# Altium PCB triumvi_v9_sensing.PcbDoc
Units mil, origin at the board's own origin, x right, y up, seen from the top; angles counter-clockwise.
Board outline 1100 x 1020 mil, 4 copper layers (Top Layer, GND, Signal Layer 2, Bottom Layer), stack 30.634 mil thick; 63 components, 46 nets, 225 pads, 86 vias.
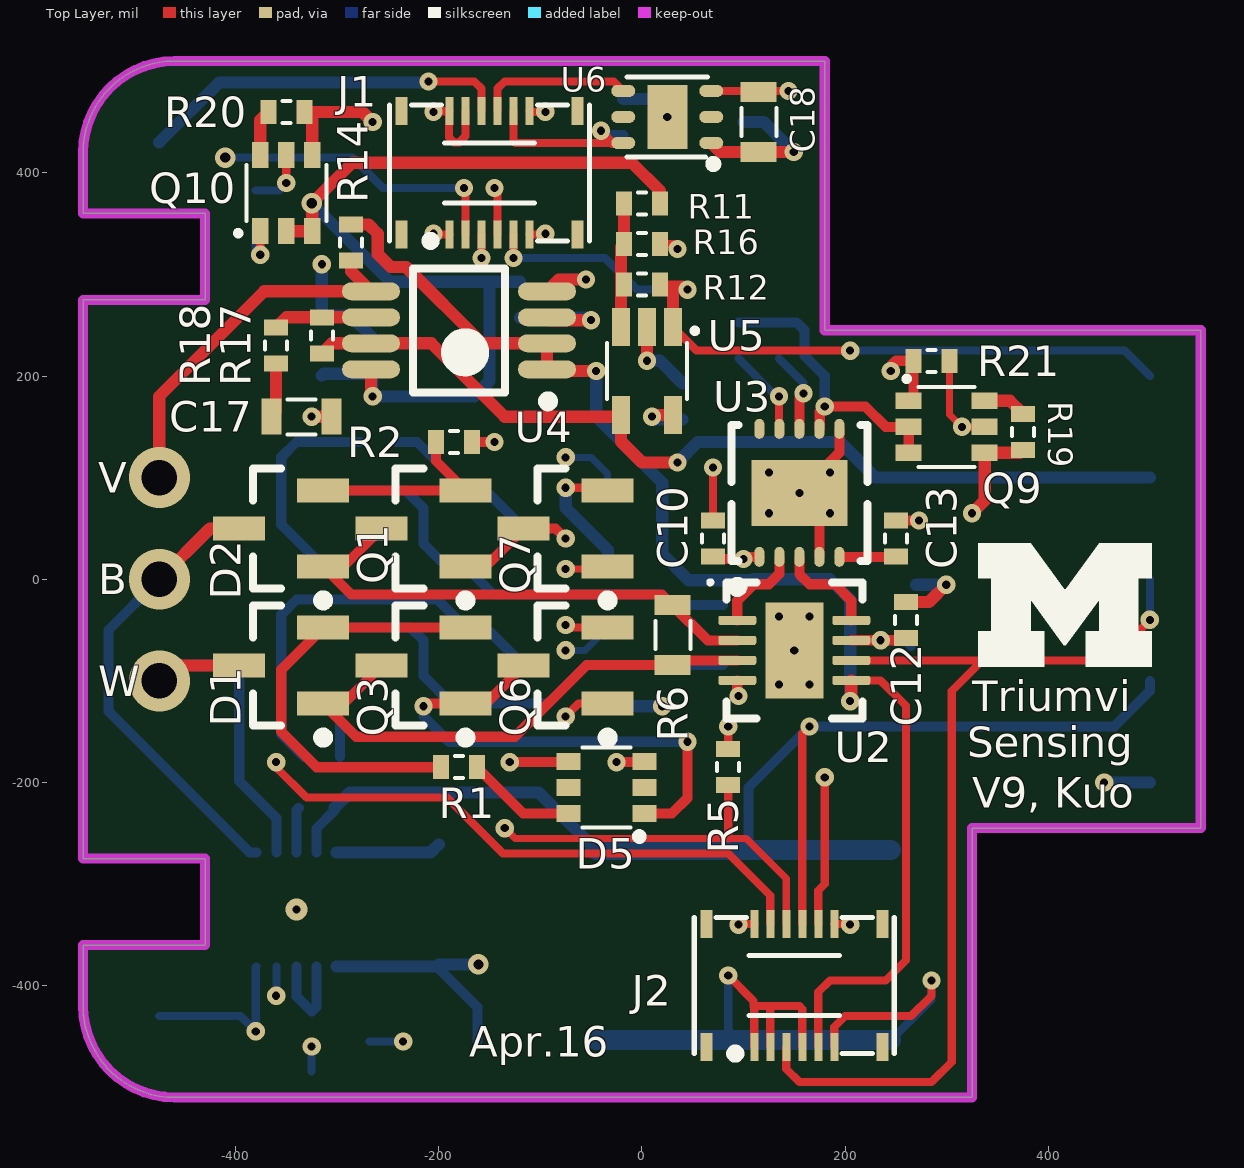
[diagram p0: Top Layer view]
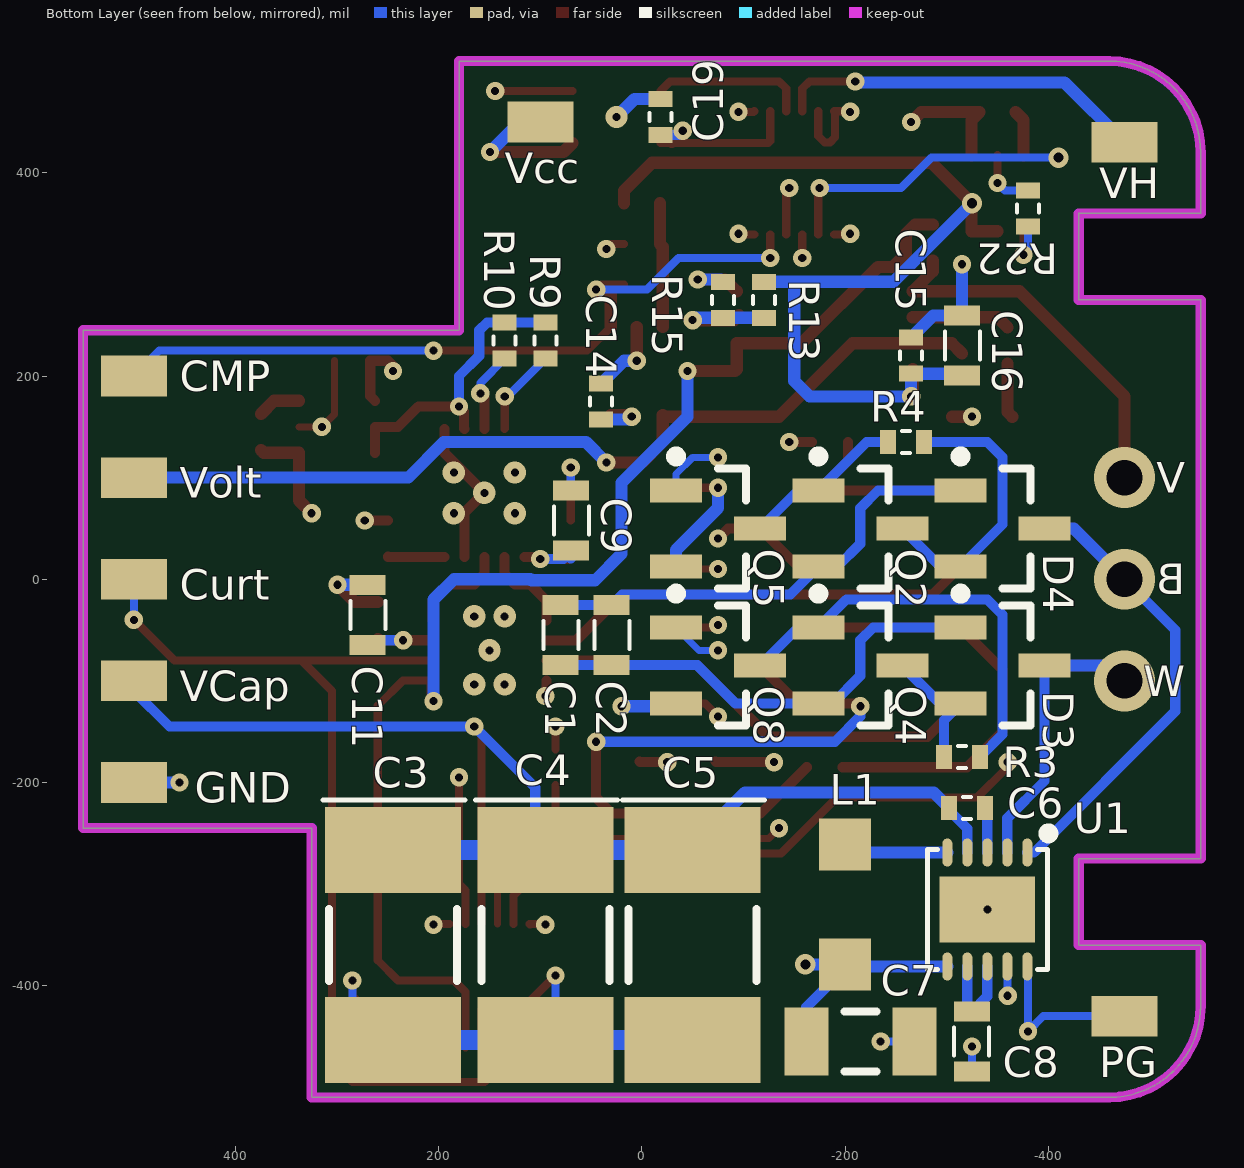
[diagram p1: Bottom Layer view, seen from below]
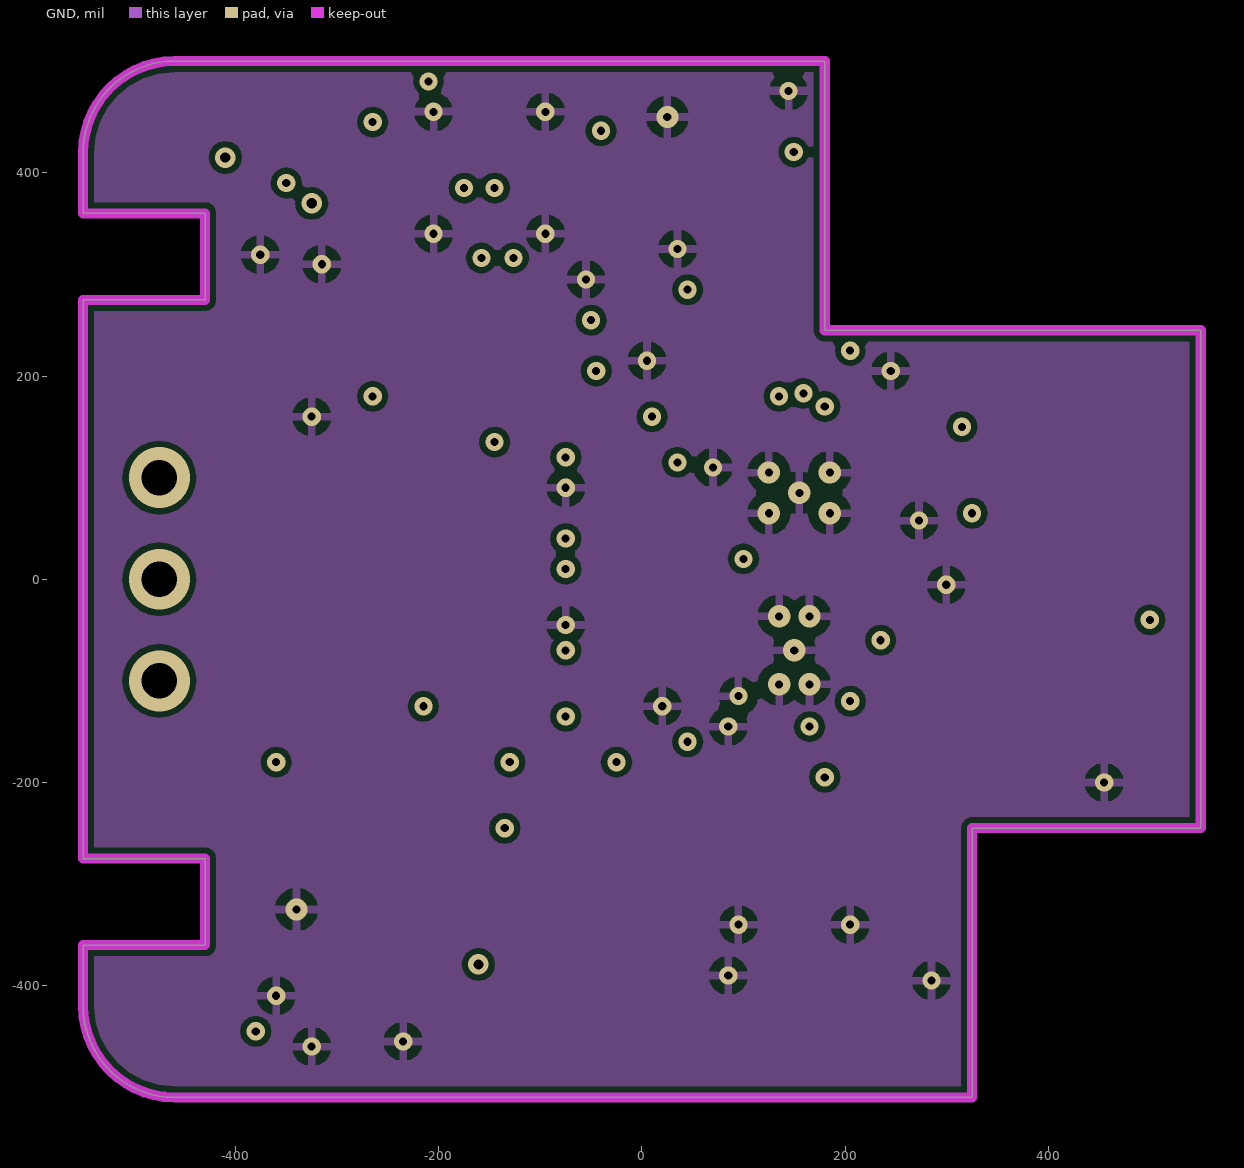
[diagram p2: GND]
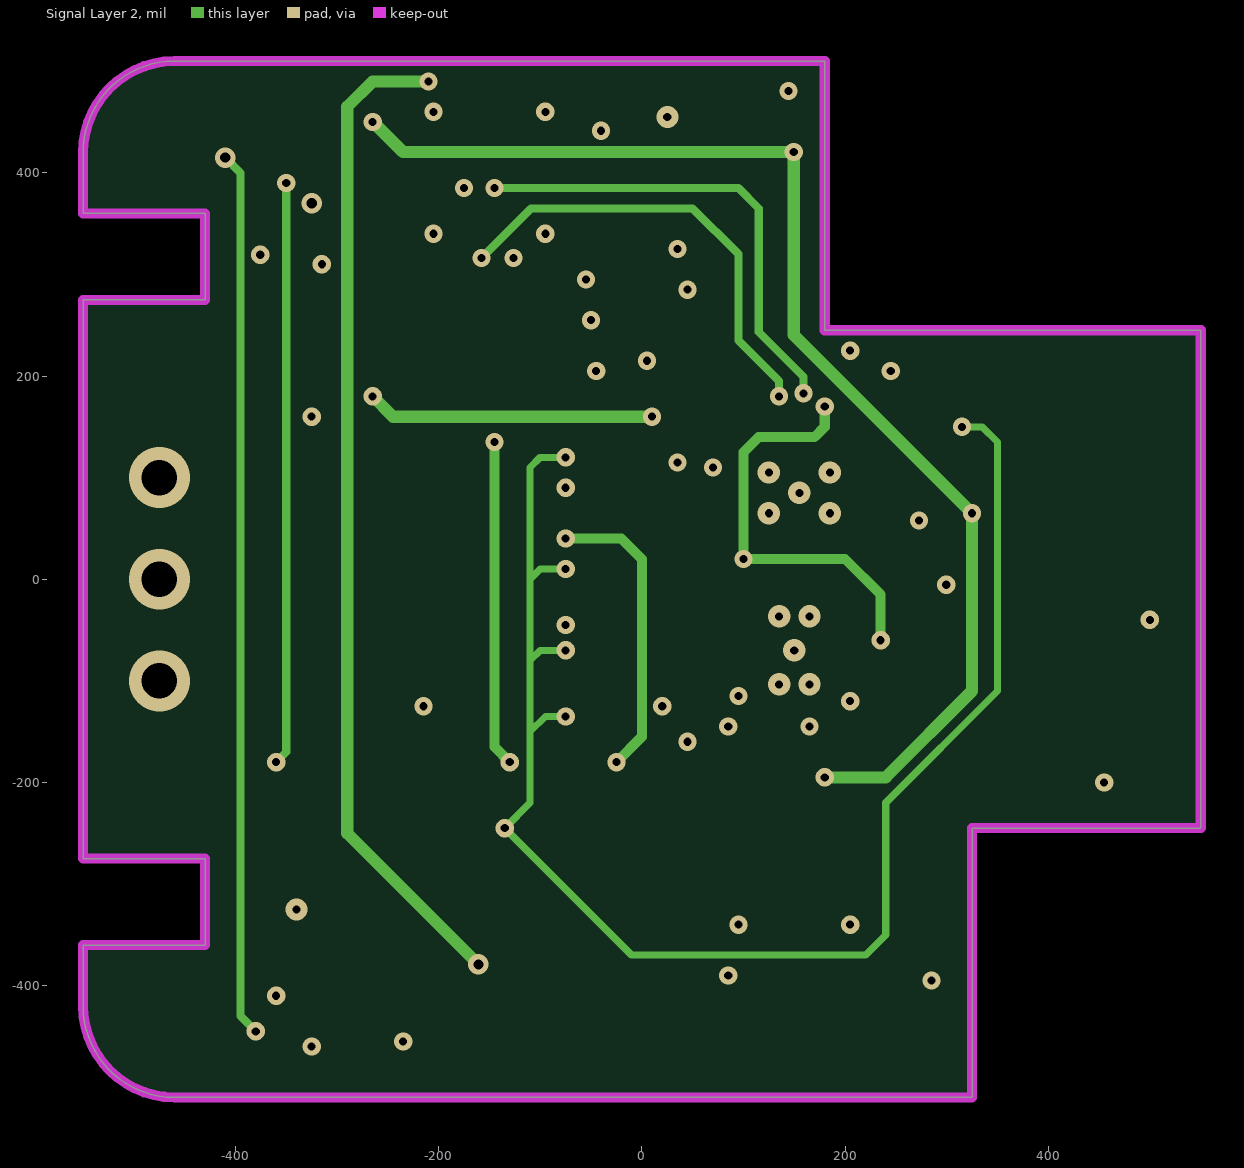
[diagram p3: Signal Layer 2]

## Layer stack, top to bottom
Top Solder: solder mask 0.4, Solder Resist, Dk 3.5
Top Layer: signal copper 1.4
Dielectric 1: core 10, FR-4, Dk 4.2
GND: signal copper 1.417
Dielectric 3: prepreg 5, Dk 4.2
Signal Layer 2: signal copper 1.417
Dielectric 2: core 10, Dk 4.2
Bottom Layer: signal copper 1.4
Bottom Solder: solder mask 0.4, Solder Resist, Dk 3.5

## Board outline
-550,-420 ccw(c-460,-420) -460,-510 325,-510 325,-245 550,-245 550,245 180,245 180,510 -460,510 ccw(c-460,420) -550,420 -550,360 -430,360 -430,275 -550,275 -550,-275 -430,-275 -430,-360 -550,-360

## Design rules (kind name [scope] priority, off if disabled: settings)
Clearance "non plated holes" [InPadClass('NPHOLES')] p1: gap=10 // Sunstone Circuits Minimum Clearance Rule (MLB~4&6 Layer Designs)
Clearance "Clearance~Sunstone Circuits" [All] p2: gap=6 // Sunstone Circuits Minimum Clearance Rule (MLB~4&6 Layer Designs)
DiffPairsRouting [All] p1: maxlimit=10 minlimit=10 mostfreqgap=10 toplayer_minwidth=6 toplayer_maxwidth=15 toplayer_prefwidth=15 midlayer1_minwidth=6 midlayer1_maxwidth=15 midlayer1_prefwidth=15 midlayer2_minwidth=6 midlayer2_maxwidth=15 midlayer2_prefwidth=15 bottomlayer_minwidth=6 bottomlayer_maxwidth=15 bottomlayer_prefwidth=15 maxuncoupledlength=500
HoleSize "HoleSize~Sunstone Circuits" [All] p1: absolutevalues=TRUE maxlimit=251 minlimit=8 maxpercent=80.000 minpercent=20.000 // Sunstone Circuits Hole Size Rule (MLB~4&6 Layer Designs)
HoleSize Testpoint [All] p2: absolutevalues=TRUE maxlimit=100 minlimit=1 maxpercent=80.000 minpercent=20.000
HoleSize TestPointUsage [All] p3: absolutevalues=TRUE maxlimit=100 minlimit=1 maxpercent=80.000 minpercent=20.000
MinimumAnnularRing "MinimumAnnularRing~Sunstone Circuits" [All] p1 off: minimumring=7 // Sunstone Circuits Minimum Annular Ring (MLB~4&6 Layer Designs)
MinimumSolderMaskSliver [All] p1 off: minsoldermaskwidth=10
PlaneClearance "PlaneClearance~Sunstone Circuits" [All] p1: clearance=12 // Sunstone Circuits Power Plane Clearance Rule (MLB~4&6 Layer Designs)
PlaneConnect "PlaneConnect~Sunstone Circuits" [All] p1: planeconnectstyle=Relief reliefexpansion=10 reliefentries=4 reliefconductorwidth=8 reliefairgap=10 // Sunstone Circuits Power Plane Connect Rule (MLB~4&6 Layer Designs)
PolygonConnect "PolygonConnect~Sunstone Circuits" [All] p1: connectstyle=Relief reliefconductorwidth=8 reliefentries=4 polygonreliefangle="90 Angle" airgapwidth=10 // Sunstone Circuits Polygon Connect Style (MLB~4&6 Layer Designs)
RoomDefinition U_Power_supply [InComponentClass('U_Power_supply')] p1 off: confinementstyle=ConfineIn formatcopy=TRUE lockcomponents=FALSE outline -412.44,316.84 -412.44,443.16 -392.48,443.16 -392.48,488.7 -47.99,488.7 -47.99,527.99 97.99,527.99 97.99,506.26 149.61,506.26 327.48,506.26 327.48,243.7 327.48,212.44 363.16,212.44 363.16,187.48 403.7,187.48 403.7,102.52 363.16,102.52 363.16,98.66 236.84,98.66 236.84,316.84
RoomDefinition U_Connectors [InComponentClass('U_Connectors')] p2 off: confinementstyle=ConfineIn formatcopy=TRUE lockcomponents=FALSE outline -260.93,312.59 -260.93,487.41 -39.07,487.41 260.93,487.41 260.93,-312.59 260.93,-487.41 39.07,-487.41 39.07,312.59
RoomDefinition U_Energy_harvesting [InComponentClass('U_Energy_harvesting')] p3 off: confinementstyle=ConfineIn formatcopy=TRUE lockcomponents=FALSE outline -419.88,-412.76 -419.88,-230.35 -362.48,-230.35 -362.48,-196.3 96.3,-196.3 96.3,-142.52 193.7,-142.52 193.7,-203.35 332.76,-203.35 332.76,-516.65 -137.76,-516.65 -137.76,-511.26 -359.61,-511.26 -359.61,-412.76
RoomDefinition U_CT_switching [InComponentClass('U_CT_switching')] p4 off: confinementstyle=ConfineIn formatcopy=TRUE lockcomponents=FALSE outline -443.74,-175.71 -443.74,140.71 -302.48,140.71 -302.48,163.7 -217.52,163.7 -142.52,163.7 -142.52,140.71 13.74,140.71 13.74,1.26 114.61,1.26 114.61,-111.26 113.7,-111.26 113.7,-227.48 27.21,-227.48 27.21,-270.43 -97.21,-270.43 -97.21,-213.7 -222.48,-213.7 -222.48,-203.7 -357.48,-203.7 -357.48,-175.71
RoomDefinition U_IV_sensing [InComponentClass('U_IV_sensing')] p5 off: confinementstyle=ConfineIn formatcopy=TRUE lockcomponents=FALSE outline -391.26,125.39 -391.26,194.61 -388.7,194.61 -388.7,272.48 -349.61,272.48 -349.61,286.26 -315,286.26 -315,326.85 -292.48,326.85 -292.48,363.7 -37.48,363.7 -37.48,403.7 47.48,403.7 47.48,280.01 67.44,280.01 67.44,273.7 222.48,273.7 222.48,178.66 248.66,178.66 248.66,82.48 278.7,82.48 278.7,21.26 304.61,21.26 304.61,-91.26 243.86,-91.26 243.86,-151.85 53.39,-151.85 53.39,-2.48 41.3,-2.48 41.3,1.46 35.39,1.46 35.39,125.39
RoutingVias "RoutingVias~Sunstone Circuits" [All] p1: holewidth=16 width=30 viastyle="Through Hole" minholewidth=6 minwidth=18 maxholewidth=20 maxwidth=40 // Sunstone Circuits Routing Vias Rule (MLB~4&6 Layer Designs)
ShortCircuit "ShortCircuit~Sunstone Circuits" [All] p1: allowed=FALSE // Sunstone Circuits Short Circuit Rule~Do Not Allow (MLB~4&6 Layer Designs)
SilkToSilkClearance [All] p1 off: silktosilkclearance=10
SilkToSolderMaskClearance [IsPad] p1 off: minsilkscreentomaskgap=10 clearancetoexposedcopper=TRUE
SolderMaskExpansion TentVias [isVia] p1: expansion=-20 // Sunstone Circuits Solder Mask Expansion Rule (MLB~4&6 Layer Designs)
SolderMaskExpansion "SolderMaskExpansion~Sunstone Circuits" [All] p2: expansion=3 // Sunstone Circuits Solder Mask Expansion Rule (MLB~4&6 Layer Designs)
ViasUnderSMD "ViasUnderSMD~Sunstone Circuits" [All] p1: allowed=FALSE // Sunstone Circuits Vias Under SMD~Do Not Allow (MLB~4&6 Layer Designs)
Width "Width~Sunstone Circuits" [All] p1: maxlimit=100 minlimit=6 preferedwidth=10 // Sunstone Circuits Minimum Width Rule (MLB~4&6 Layer Designs)
22 further rules are at their usual default settings.

## Classes and differential pairs
component class U_Connectors: J1 J2
component class U_CT_switching: C1 C2 D1 D2 D3 D4 D5 Q1 Q2 Q3 Q4 Q5 Q6 Q7 Q8 R1 R2 R3 R4 R5 R6
component class U_Energy_harvesting: C3 C4 C5 C6 C7 C8 L1 U1
component class U_IV_sensing: C9 C10 C11 C12 C13 C14 C15 C16 C17 R9 R10 R11 R12 R13 R14 R15 R16 R17 R18 U2 U3 U4 U5
component class U_Power_supply: C18 C19 Q9 Q10 R19 R20 R21 R22 U6

## Components (designator, comment, footprint, x,y, rotation, side; value= is the part's Value field where it differs from the comment)
C1 "Ceramic capacitor" 0603 80,-55 r90 bottom
C2 "Ceramic capacitor" 0603 30,-55 r90 bottom
C3 "Tantalum capacitor" 2312 245,-360 r270 bottom
C4 "Tantalum capacitor" 2312 95,-360 r270 bottom
C5 "Tantalum capacitor" 2312 -50,-360 r270 bottom
C6 "Ceramic capacitor" 0402 -320,-225 r180 bottom
C7 "Ceramic capacitor" 1206 -215,-455 r180 bottom
C8 "Ceramic capacitor" 0603 -325,-455 r270 bottom
C9 "Ceramic capacitor" 0603 70,57.72 r90 bottom
C10 "Ceramic capacitor" 0402 70,40 r90 top
C11 "Ceramic capacitor" 0603 270,-35 r90 bottom
C12 "Ceramic capacitor" 0402 260,-40 r90 top
C13 "Ceramic capacitor" 0402 250,40 r90 top
C14 "Ceramic capacitor" 0402 40,175 r90 bottom
C15 "Ceramic capacitor" 0402 -265,220 r90 bottom
C16 "Ceramic capacitor" 0603 -315,230 r90 bottom
C17 "Ceramic capacitor" 0603 -335,160 r0 top
C18 "Ceramic capacitor" 0603 115,450 r90 top
C19 "Ceramic capacitor" 0402 -18.31,455 r90 bottom
D1 "D_BAS40-04" SOT23-3 -355,-85 r180 top
D2 "D_BAS40-04" SOT23-3 -355,50 r180 top
D3 "D_BAS40-04" SOT23-3 -355,-85 r180 bottom
D4 "D_BAS40-04" SOT23-3 -355,50 r180 bottom
D5 "BAS40TW" SOT-363 -35,-205 r90 top
J1 "DF40B(2.0)-12DS-0.4V" DF40B(2.0)-12DS-0.4V -150,400 r0 top locked
J2 "DF40B(2.0)-12DS-0.4V" DF40B(2.0)-12DS-0.4V 150,-400 r0 top
L1 "Chip inductor" CDRH2D18 -200,-320 r90 bottom
Q1 "Si2301CDS" SOT23-3 -215,50 r180 top
Q2 "Si2342DS" SOT23-3 -215,50 r180 bottom
Q3 "Si2301CDS" SOT23-3 -215,-85 r180 top
Q4 "Si2342DS" SOT23-3 -215,-85 r180 bottom
Q5 "Si2338DS" SOT23-3 -75,50 r180 bottom
Q6 "Si2338DS" SOT23-3 -75,-85 r180 top
Q7 "Si2338DS" SOT23-3 -75,50 r180 top
Q8 "Si2338DS" SOT23-3 -75,-85 r180 bottom
Q9 "Si1865DDL" SC70-6 300,150 r270 top
Q10 "Si1865DDL" SC70-6 -350,380 r0 top
R1 "Chip resistor" 0402 -180,-185 r0 top
R2 "Chip resistor" 0402 -185,135 r0 top
R3 "Chip resistor" 0402 -315,-175 r180 bottom
R4 "Chip resistor" 0402 -260,135 r0 bottom
R5 "Chip resistor" 0402 85,-185 r90 top
R6 "Chip resistor" 0603 30,-55 r90 top
R9 "Chip resistor" 0402 95,235 r270 bottom
R10 "Chip resistor" 0402 135,235 r270 bottom
R11 "Chip resistor" 0402 0,370 r180 top
R12 "Chip resistor" 0402 0,290 r0 top
R13 "Chip resistor" 0402 -120,275 r270 bottom
R14 "Chip resistor" 0402 -286.36,331.36 r270 top
R15 "Chip resistor" 0402 -80,275 r90 bottom
R16 "Chip resistor" 0402 0,330 r0 top
R17 "Chip resistor" 0402 -315,240 r270 top
R18 "Chip resistor" 0402 -360,230 r270 top
R19 "Chip resistor" 0402 375,145 r90 top
R20 "Chip resistor" 0402 -350,460 r180 top
R21 "Chip resistor" 0402 285,215 r180 top
R22 "Chip resistor" 0402 -380,365 r270 bottom
U1 "LTC3588-1" QFN-10 -340,-325 r270 bottom
U2 "INA333_WSON" WSON-8 150,-70 r0 top
U3 "AD5274" LFCSP_WD 155,85 r90 top
U4 "MCP6032" MSOP-8 -180,245 r180 top
U5 "TS881" SC70-5 5,205 r180 top
U6 "ADP151_LFCSP" CP-6-3 25,455 r180 top

## Footprints (in the part's own frame and the unit in brackets; to place one, negate y for a bottom-side part, rotate by r counter-clockwise, add the part's x,y. Pads: shape width x height; smd on the part's side, far side on the other; paste and mask are expansions set on the pad)
0402 [mm] "2-Leads, Body 1.00x0.50mm, IPC Medium Density"
  rect 0.4x0.6 smd: 1(-0.45,0) 2(0.45,0)
  silkscreen extent -0.1,-0.28 0.1,0.28, body extent -0.53,-0.28 0.53,0.27, height 0.4
0603 [mm] "2-Leads, Body 1.55x0.85mm, IPC Medium Density"
  rect 0.5x0.9 smd: 1(-0.75,0) 2(0.75,0)
  silkscreen extent -0.35,-0.45 0.35,0.43, body extent -0.75,-0.42 0.75,0.43, height 0.5
1206 [mm]
  rect 1.1x1.7 smd: 1(-1.35,0) 2(1.35,0)
  silkscreen extent -0.4,-0.75 0.4,0.75, body extent -1.7,-0.9 1.7,0.9, height 1.3
2312 [mm] "Chip Capacitor, 2-Leads, Body 6.00x3.20mm, IPC Medium Density"
  rect 2.15x3.4 smd: 1(-2.375,0) 2(2.375,0)
  silkscreen extent -3.62,-1.75 0.9,1.8, body extent -3.1,-1.7 3.1,1.7, height 2.6
CDRH2D18 [mm] "Sumdia SMD power inductor"
  rect 1.3x1.3 smd: 1(-1.5,0) 2(1.5,0)
  body extent -1.5,-1.7 1.5,1.8, height 2
CP-6-3 [mm] "QFN, 6-Leads, Body 2.00x2.00mm, Pitch 0.65mm, Thermal Pad 1.00x1.55mm, IPC Medium Density"
  oval 0.6x0.3 smd: 1(-1.1,0.65) 2(-1.1,0) 3(-1.1,-0.65) 4(1.1,-0.65) 5(1.1,0) 6(1.1,0.65)
  rect 1x1.6 smd: 7(0,0)
  silkscreen extent -1.25,-1 1,1.27, body extent -1,-1 1,1, height 0.6
DF40B(2.0)-12DS-0.4V [mm] "Hirose DF40 Series, 0.4 mm pitch, 2.0 mm stack height, 12 positions"
  rect 0.2x0.7 smd: 1(-1,-1.54) 2(-0.6,-1.54) 3(-0.2,-1.54) 4(0.2,-1.54) 5(0.6,-1.54) 6(1,-1.54) 7(1,1.54) 8(0.6,1.54) 9(0.2,1.54) 10(-0.2,1.54) 11(-0.6,1.54) 12(-1,1.54)
  rect 0.3x0.7 smd: ""(-2.2,-1.54) ""(-2.2,1.54) ""(2.2,-1.54) ""(2.2,1.54)
  silkscreen extent -2.5,-1.8 2.5,1.7, body extent -2.5,-1.69 2.5,1.69, height 1.9
LFCSP_WD [mm] "QFN, 10-Leads, Body 3.00x3.00mm, Pitch 0.50mm, Thermal Pad 1.63x2.36mm, IPC Medium Density"
  oval 0.5x0.25 smd: 1(-1.6,1) 2(-1.6,0.5) 3(-1.6,0) 4(-1.6,-0.5) 5(-1.6,-1) 6(1.6,-1) 7(1.6,-0.5) 8(1.6,0) 9(1.6,0.5) 10(1.6,1)
  rect 1.65x2.4 smd: 11(0,0)
  silkscreen extent -2.47,-1.7 1.7,1.7, body extent -1.55,-1.55 1.55,1.55, height 0.8
MSOP-8 [mm] "TSOP, 8-Leads, Body 3.00x3.00mm, Pitch 0.65mm, IPC Medium Density"
  oval 1.45x0.45 smd: 1(-2.2,0.975) 2(-2.2,0.325) 3(-2.2,-0.325) 4(-2.2,-0.975) 5(2.2,-0.975) 6(2.2,-0.325) 7(2.2,0.325) 8(2.2,0.975)
  silkscreen extent -2.35,-1.55 1.15,1.9, body extent -1.55,-1.55 1.55,1.55, height 1.1
QFN-10 [mm] "QFN, 10-Leads, Body 4.00x4.00mm, Pitch 0.50mm, Thermal Pad 1.65x2.38mm, IPC Medium Density"
  oval 0.7x0.25 smd: 1(-1.425,1) 2(-1.425,0.5) 3(-1.425,0) 4(-1.425,-0.5) 5(-1.425,-1) 6(1.425,-1) 7(1.425,-0.5) 8(1.425,0) 9(1.425,0.5) 10(1.425,1)
  rect 1.65x2.38 smd: 11(0,0)
  silkscreen extent -2.02,-1.5 1.5,1.65, body extent -1.5,-1.5 1.5,1.5, height 0.75
SC70-5 [mm]
  rect 0.45x0.95 smd: 1(-0.65,-1.1) 2(0,-1.1) 3(0.65,-1.1) 4(0.65,1.1) 5(-0.65,1.1)
  silkscreen extent -1.21,-1 1,0.7, body extent -1,-0.7 1,0.7, height 1.1
SC70-6 [mm]
  rect 0.406x0.648 smd: 1(-0.65,-0.95) 2(0,-0.95) 3(0.65,-0.95) 4(0.65,0.95) 5(0,0.95) 6(-0.65,0.95)
  silkscreen extent -1.2,-1 1,0.7, body extent -1,-0.7 1,0.7, height 1.1
SOT23-3 [mm] "SOT23, 3-Leads, Body 2.9x1.3mm, Pitch 0.95mm, Lead Span 2.3mm, IPC Medium Density"
  rect 1.3x0.6 smd: 1(-1.05,0.95) 2(-1.05,-0.95) 3(1.05,0)
  silkscreen extent -1.18,-1.5 0.7,1.92, body extent -0.7,-1.5 0.7,1.5, height 1.2
SOT-363 [mm]
  rect 0.42x0.6 smd: 1(-0.65,-0.95) 2(0,-0.95) 3(0.65,-0.95) 4(0.65,0.95) 5(0,0.95) 6(-0.65,0.95)
  silkscreen extent -1.28,-0.88 1,0.6, body extent -1,-0.6 1,0.6, height 1
WSON-8 [mm] "SON, 8-Leads, Body 3.00x3.00mm, Pitch 0.50mm, Thermal Pad 2.40x1.29mm, IPC Medium Density"
  rrect50% 0.95x0.23 smd: 1(-1.425,0.75) 2(-1.425,0.25) 3(-1.425,-0.25) 4(-1.425,-0.75) 5(1.425,-0.75) 6(1.425,-0.25) 7(1.425,0.25) 8(1.425,0.75)
  rect 1.45x2.4 smd: 9(0,0)
  silkscreen extent -2.15,-1.7 1.7,1.75, body extent -1.55,-1.55 1.55,1.55, height 0.8

## Part data
C1 C2: library part C_0.1u_25V_0603_ceramic, "Ceramic capacitor, 0.1 uF, 0603 package"
C3 C4 C5: library part C_220u_10V_2312_tantalum, "Tantalum capacitor, 220 uF, 10 V, 2312 package"
C6 C13 C19: library part C_1u_16V_0402_ceramic, "Ceramic capacitor, 1 uF, 16V, 0402 package"
C7: library part C_100u_6.3V_1206_ceramic, "Ceramic capacitor, 100 uF, 6.3 V, 1206 package"
C8 C18: library part C_4.7u_10V_0603_ceramic, "Ceramic capacitor, 4.7u, 10V, 0603 package"
C9 C11 C16 C17: library part C_10u_6.3V_0603_ceramic, "Ceramic capacitor, 10 uF, 0603 package"
C10 C12 C14 C15: library part C_0.1u_16V_0402_ceramic, "Ceramic capacitor, 0.1u, 16 V, 0402 package"
D1 D2 D3 D4: "SURFACE MOUNT SCHOTTKY BARRIER DIODE"
D5: library part D_BAS40TW, "SURFACE MOUNT SCHOTTKY BARRIER DIODE ARRAYS"
J1 J2: "Hirose BM20 Series, 0.4mm pitch, 2mm stack height, 12 pos, header"
L1: library part L_10uH_1A_180m, "Chip inductor, 10 uH,  1A, 180 mOhm"
Q1 Q3: "P-Channel 20 V (D-S) MOSFET"
Q2 Q4: "N-Channel 8 V (D-S) MOSFET"
Q5 Q6 Q7 Q8: "N-Channel 30 V (D-S) MOSFET"
Q9 Q10: "Load Switch with Level-Shift"
R1 R2 R17: library part R_47K_0402, "Chip resistor, 47K, 0402 package"
R3 R4 R5 R13 R15 R19 R20 R21 R22: library part R_1M_0402, "Chip resistor, 1M, 0402 package"
R6: library part R_90.9_0603, "Chip resistor, 90.9, 0603 package"
R9 R10: library part R_10K_0402, "Chip resistor, 10K, 0402 package"
R11 R14 R16: library part R_100K_0402, "Chip resistor, 100K, 0402 package"
R12: library part R_2M_0402, "Chip resistor, 2M, 0402 package"
R18: library part R_100_0402, "Chip resistor, 100, 0402 package"
U1: "Piezoelectric Energy   Harvesting Power Supply"
U2: "Micro-Power (50£gA), Zero-Drift, Rail-to-Rail Out  Instrumentation Amplifier"
U3: "1024-/256-Position, 1% Resistor Tolerance Error, I2C Interface and 50-TP Memory Digital Rheostat"
U4: "0.9 £gA, High Precision Op Amps"
U5: "Rail-to-rail 0.9 V nanopower comparator"
U6: "Ultralow Noise, 200 mA,  CMOS Linear Regulator"

## Free pads (board coordinates)
  rect 65x40 smd far side: ""(-475,-430) ""(-475,430) ""(100,450) ""(500,-200) ""(500,-100) ""(500,0) ""(500,100) ""(500,200)

## Via types
v1: diameter 18, hole 8, Top Layer to Bottom Layer, 68 vias
v2: diameter 22, hole 8, Top Layer to Bottom Layer, 11 vias
v3: diameter 20, hole 10, Top Layer to Bottom Layer, 3 vias
v4: diameter 60, hole 35, Top Layer to Bottom Layer, 3 vias
v5: diameter 21.65, hole 8, Top Layer to Bottom Layer, 1 vias

## Nets (pads, with @x,y where several pads share a name; then routed paths per layer and width w, separated by ;. In a path a pad name is that pad's centre, name@x,y a point inside that pad or via, vN(x,y) a via of type N, cw(c..) or ccw(c..) an arc to the next point about the centre after c; other vN are vias at no path point)
CT1: D2.3 D4.3 U1.1 | length 552.6
  Top Layer w12: v4(-475,0) -425,50 D2.3
  Bottom Layer w10: v4(-475,0) -525,-50 -525,-130 -386.1,-268.9 U1.1
  Bottom Layer w12: v4(-475,0) -425,50 D4.3
CT2: D1.3 D3.3 U1.2 | length 368.8
  Top Layer w12: v4(-475,-100) -460,-85 D1.3
  Bottom Layer w10: D3.3 -396.34,-198.66 -359.68,-235.32 U1.2
  Bottom Layer w12: v4(-475,-100) -460,-85 D3.3
CURRENT_WAVEFORM: J2.3 pad.@500,0 U2.6 | length 956
  Top Layer w8: J2.3 142.13,-482.13 155,-495 285,-495 305,-475 305,-109.84 335,-79.84 ; U2.6 335,-79.84 ; v1(500,-40) 460.16,-79.84 335,-79.84
  Bottom Layer w8: v1(500,-40) pad.@500,0
CURRENTMEASUREEN: J2.10 Q5.1 Q6.1 Q7.1 Q8.1 Q9.5 R5.1 R21.1 | length 2222
  Top Layer w7: v1(-135,-245) -125,-255 85,-255 102.5,-255 142.13,-294.63 J2.10 ; v1(-75,10) -36.26,10 Q7.1 ; R21.1 302.72,162.28 v1(315,150) Q9.5
  Top Layer w8: v1(-75,-135) -62.4,-122.4 Q6.1 ; 85,-255 R5.1
  Signal Layer 2 w7: v1(-75,-135) -95,-135 -110,-150 ; v1(-75,-70) -100,-70 -110,-80 ; v1(-75,10) -100,10 -110,0 ; v1(-75,120) -100,120 -110,110 -110,0 ; v1(315,150) 335,150 350,135 350,-110 240,-220 240,-350 220,-370 -10,-370 v1(-135,-245) -110,-220 -110,-150 ; -110,-150 -110,-80 ; -110,-80 -110,0
  Bottom Layer w7: v1(-75,-70) -56.06,-70 Q8.1 ; v1(-75,120) -50,120 -33.66,103.66 Q5.1
GND: C3.2 C4.2 C5.2 C7.2 C8.2 C9.2 C10.2 C11.2 C12.2 C13.2 C14.2 C15.2 C16.2 C17.2 C18.2 C19.2 J1.1 J1.6 J1.7 J1.11 J1.12 J2.1 J2.2 J2.4 J2.6 J2.7 J2.12 pad.@500,-200 Q5.2 Q6.2 Q7.2 Q8.2 Q9.1 Q10.1 R5.2 R15.2 R16.2 R21.2 R22.2 U1.9 U1.11 U2.4 U2.9 U3.4 U3.6 U3.11 U4.4 U5.2 U6.3 U6.7 | length 2230.5
  Top Layer w8: v1(-375.59,319.41) Q10.1 ; v1(-205,340) -204.37,339.37 J1.1 ; v1(-205,460) -204.37,460.63 J1.12 -190,460 -190,435 -185,430 -180,430 -173.62,436.38 J1.11 ; J1.6 -95.63,339.37 v1(-95,340) ; J1.7 -110,460 v1(-95,460) ; v1(-75,-45) -72.4,-47.6 Q6.2 ; v1(-75,90) -36.26,90 Q7.2 ; R16.2 30,330 v1(35,325) ; U6.3 v1(144.41,480.59) v1@145,480 ; C10.2 v1(70,110) ; v1(85,-390) 110,-415 110,-420 ; R5.2 v1(85,-145) ; v1(95,-340) 95.63,-339.37 J2.12 J2.12@110,-340 ; J2.1 110.63,-420.63 110,-420 ; J2.2 126.38,-421.38 125,-420 ; J2.4 157.87,-422.87 155,-420 125,-420 ; J2.6 189.37,-440.63 200,-430 265,-430 285,-410 v1(285,-395) ; J2.7 204.37,-339.37 v1(205,-340) ; 110,-420 125,-420
  Top Layer w10: U2.4 93.9,-113.9 v1(95,-115) ; U3.4 174.68,65.32 v2(155,85) 194.37,124.37 U3.6 ; v1(245,205) 245,210 250,215 R21.2 267.28,180.28 Q9.1 ; C13.2 v1(272.72,57.72) v1@275,60
  Top Layer w12: v1(-325,160) C17.2 ; U4.4 -81.77,295 v1(-55,295) ; v1(5,215) U5.2 ; C12.2 282.72,-22.28 v1(299.53,-5.47)
  Bottom Layer w8: R22.2 -380,323.82 v1(-375.59,319.41) ; v1(-360,-410) -359.68,-409.68 U1.9 ; C8.2 v1(-325,-460) ; C7.2 v1(-235,-455) ; C9.2 v1(70,110) ; v1(85,-390) 85,-443.5 C4.2 ; C3.2 285,-413.5 v1(285,-395)
  Bottom Layer w12: v1(-315,310) C16.2 -286.81,259.53 C15.2 ; R15.2 -77.72,295 v1(-55,295) ; v1(-75,90) -75,70 -33.66,28.66 Q5.2 ; Q8.2 -31.06,-125 v1(20,-125) ; C19.2 7.28,472.72 v5(25,455) ; v1(5,215) 17.72,215 C14.2 ; C11.2 v1(299.53,-5.47) ; v1(455,-200) pad.@500,-200
  Bottom Layer w20: C5.2@-45,-453.5 C4.2 C3.2
  other v2: -340,-325 135.04,-103.46 164.96,-103.46 150,-70 135.04,-36.54 164.96,-36.54 125,65 185,65 125,105 185,105
IN+: D1.1 Q3.3 R6.1 U2.3 | length 525
  Top Layer w10: Q3.3 -293.74,-122.4 D1.1 -281.06,-155 -125,-155 -54.53,-84.53 R6.1 34.69,-79.84 U2.3
IN-: D2.1 Q1.3 R6.2 U2.2 | length 510.5
  Top Layer w10: Q1.3 -293.74,12.6 D2.1 -286.06,-15 19.53,-15 R6.2 64.68,-60.16 U2.2
NetC1_1: C1.1 C2.1 D3.1 Q4.2 | length 460.8
  Bottom Layer w10: D3.1 -227.4,-47.6 -215,-60 -215,-95 -187.6,-122.4 Q4.2 -92.4,-122.4 -54.53,-84.53 C2.1 C1.1
NetC1_2: C1.2 C2.2 D4.1 Q2.2 | length 460.9
  Bottom Layer w10: D4.1 -232.4,87.4 -215,70 -215,35 -192.6,12.6 Q2.2 -146.06,-15 19.53,-15 C2.2 C1.2
NetC6_2: C6.2 U1.3 | length 44.8
  Bottom Layer w10: U1.3 -340,-227.72 -340,-227.28 C6.2
NetC8_1: C8.1 U1.7 U1.8 | length 96.9
  Bottom Layer w10: U1.8 -340,-410.47 C8.1 -320.32,-420.79 U1.7
NetC13_1: C13.1 U3.5 | length 55.7
  Top Layer w10: U3.5 249.72,22.01 C13.1
NetC17_1: C17.1 R18.2 | length 54.2
  Top Layer w12: C17.1 -360,164.53 R18.2
NetD1_2: D1.2 Q3.2 R1.1 | length 431.3
  Top Layer w10: R1.1 -320,-185 -355,-150 -355,-88.94 D1.2 Q3.2
NetD2_2: D2.2 Q1.2 R2.1 | length 199.6
  Top Layer w10: D2.2 Q1.2 -202.72,116.46 R2.1
NetD3_2: D3.2 Q4.3 R3.1 | length 132.2
  Bottom Layer w10: R3.1 -297.28,-138.78 D3.2 -293.74,-122.4 Q4.3
NetD4_2: D4.2 Q2.3 R4.1 | length 280.8
  Bottom Layer w10: R4.1 -340,135 -355,120 -355,53.94 D4.2 -293.74,12.6 Q2.3
NetD5_1: D5.1 Q3.1 Q6.3 | length 499.6
  Top Layer w10: v1(-215,-125) -212.4,-122.4 Q3.1 -153.74,-122.4 Q6.3 ; D5.1 29.41,-230.59 45,-215 v1(45,-160)
  Bottom Layer w10: v1(-215,-125) -215,-135 -190,-160 v1(45,-160)
NetD5_3: D5.3 Q1.1 Q7.3 | length 439.6
  Top Layer w10: Q1.1 -153.74,12.6 Q7.3 -85,50 v1(-75,40) ; v1(-25,-180) 1.81,-180 D5.3
  Signal Layer 2 w10: v1(-75,40) -20,40 0,20 0,-155 v1(-25,-180)
NetD5_4: D5.4 R2.2 | length 401.3
  Top Layer w10: R2.2 v1(-145,135) ; v1(-130,-180) -72.99,-180 D5.4
  Signal Layer 2 w10: v1(-145,135) -145,-165 v1(-130,-180)
NetD5_6: D5.6 R1.2 | length 108.8
  Top Layer w10: R1.2 -116.69,-230.59 D5.6
NetJ1_3: J1.3 R9.2 U3.9 | length 559.1
  Top Layer w8: v1(-157.87,316.19) J1.3 ; v1(135,180) 135,148.31 U3.9
  Signal Layer 2 w8: v1(-157.87,316.19) -109.06,365 50,365 95,320 95,235 135,195 v1(135,180)
  Bottom Layer w8: R9.2 132.28,180 v1(135,180)
NetJ1_4: J1.4 R10.2 U3.8 | length 596.3
  Top Layer w8: v1(-145,385) -142.13,382.13 J1.4
  Top Layer w10: U3.8 155,178.94 v1(159,182.94)
  Signal Layer 2 w8: v1(-145,385) 95,385 115,365 115,243.28 159,199.28 v1(159,182.94)
  Bottom Layer w8: R10.2 159,193.28 v1(159,182.94)
NetJ1_9: J1.9 U6.4 | length 152.9
  Top Layer w8: J1.9 -142.13,482.87 -135,490 -27.72,490 U6.4
NetL1_2: L1.2 U1.5 | length 103.9
  Bottom Layer w12: U1.5 -207.95,-268.9 L1.2
NetQ2_1: Q2.1 Q5.3 R4.2 | length 161.2
  Bottom Layer w10: R4.2 -221.26,135 Q2.1 -153.74,87.4 Q5.3
NetQ4_1: Q4.1 Q8.3 R3.2 | length 421
  Bottom Layer w10: R3.2 -355,-152.72 -355,-35 -340,-20 -201.26,-20 Q4.1 -153.74,-47.6 Q8.3
NetQ9_6: Q9.6 R19.2 | length 42.9
  Top Layer w12: Q9.6 362.13,175.59 R19.2
NetQ10_6: Q10.6 R20.2 | length 45.9
  Top Layer w12: Q10.6 -375.59,452.13 R20.2
NetR11_2: R11.2 R12.1 R16.1 U5.3 | length 122.9
  Top Layer w12: U5.3 -20.59,327.13 R16.1 R11.2
NetR17_1: R17.1 R18.1 U4.6 | length 97.6
  Top Layer w12: R18.1 -349.92,257.8 U4.6
NetU2_1: U2.1 U3.2 | length 88.4
  Top Layer w10: U2.1 93.9,-21.1 110,-5 125,-5 135.31,5.31 U3.2
NetU2_8: U2.8 U3.3 | length 98.3
  Top Layer w10: U3.3 155,5 165,-5 190,-5 206.1,-21.1 U2.8
PGOOD: J1.2 pad.@-475,-430 U1.10 | length 1331.4
  Top Layer w8: v1(-175,385) -173.62,383.62 J1.2
  Signal Layer 2 w8: v3(-410,415) -395,400 -395,-430 v1(-380,-445)
  Bottom Layer w8: pad.@-475,-430 -395,-430 v1(-380,-445) -380,-381.73 U1.10 ; v3(-410,415) -285,415 -255,385 v1(-175,385)
V_HARVEST: C7.1 J1.10 L1.1 pad.@-475,430 U1.6 | length 1583.2
  Top Layer w8: v1(-210,490) -165,490 -157.87,482.87 J1.10
  Signal Layer 2 w12: v1(-210,490) -265,490 -290,465 -290,-250 v3(-160.94,-379.06)
  Bottom Layer w10: L1.1@-202.05,-381.1 -161.85,-421.3 C7.1
  Bottom Layer w12: pad.@-475,430 -416,489 -211,489 v1(-210,490) ; U1.6 L1.1@-202.05,-381.1 ; L1.1 v3(-160.94,-379.06)
V_SELECTED: C19.1 J1.8 U6.6 | length 178.4
  Top Layer w8: J1.8 -126.38,431.38 -124.41,429.41 -29.41,429.41 U6.6
  Top Layer w10: v1(-40.25,441.47) -40.25,440.25 U6.6@-29.41,429.41
  Bottom Layer w10: v1(-40.25,441.47) -36.06,437.28 C19.1
VCAP: C3.1 C4.1 C5.1 C6.1 J2.9 pad.@500,-100 U1.4 | length 1336.4
  Top Layer w8: J2.9 157.87,-152.13 v1(165,-145)
  Bottom Layer w10: U1.4 -320.32,-245.32 -302.28,-227.28 C6.1 ; C4.1@105,-266.5 105,-205 v1(165,-145) 465,-145 500,-110 pad.@500,-100
  Bottom Layer w12: C6.1 -287.28,-210 -101.5,-210 -45,-266.5 C5.1
  Bottom Layer w20: C5.1@-45,-266.5 C4.1 105,-266.5 C3.1
VCC3: C18.1 J2.8 pad.@100,450 Q9.4 Q10.4 R19.1 R20.1 U6.1 | length 1724.4
  Top Layer w8: J2.8 173.62,-306.38 180,-300 v1(180,-195)
  Top Layer w12: Q10.4 -324.41,452.13 R20.1 -275,460 v1(-265,450) ; U6.1 77.24,420.47 C18.1 v1(149.53,420.47) ; v1(325,65) 337.4,77.4 Q9.4 372.13,124.41 R19.1
  Signal Layer 2 w12: v1(-265,450) -264.53,450 -235,420.47 v1(149.53,420.47) 149.53,240.47 v1(325,65) 325,-110 240,-195 v1(180,-195)
  Bottom Layer w12: pad.@100,450 120,450 v1(149.53,420.47)
VCC3_GATED1: C14.1 C15.1 C16.1 Q10.2 Q10.3 R11.1 R13.1 U4.8 U5.5 | length 1328.2
  Top Layer w12: Q10.2 Q10.3 -324.41,369.41 v3(-325,370) -285,410 -10,410 17.72,382.28 R11.1 ; U4.8 -266.61,181.61 v1(-265,180) ; v1(10,160) 11.69,161.69 U5.5
  Signal Layer 2 w12: v1(-265,180) -245,160 v1(10,160)
  Bottom Layer w12: v3(-325,370) -247.72,292.72 -150,292.72 ; C16.1 -313.19,202.28 C15.1 v1(-265,180) -165,180 -150,195 -150,292.72 ; R13.1 -150,292.72 ; v1(10,160) 12.72,157.28 C14.1
VCC3_GATED2: C9.1 C10.1 C11.1 C12.1 Q9.2 Q9.3 R9.1 R10.1 U2.7 U3.1 U3.7 | length 865.1
  Top Layer w10: C10.1 72.28,20 v1(100,20) 102.01,22.01 U3.1 ; U3.7 175,148.31 175,165 v1(180,170) 220,170 240,150 Q9.2 Q9.3 ; U2.7 206.26,-60 v1(235,-60) 257.72,-60 C12.1
  Signal Layer 2 w10: v1(180,170) 180,150 170,140 115,140 100,125 v1(100,20) 200,20 235,-15 v1(235,-60)
  Bottom Layer w10: C9.1@70,20.47 C9.1@71.81,22.28 ; C9.1@75,22.28 77.28,20 v1(100,20) ; R9.1 R10.1 152.28,252.72 160,245 160,220 180,200 v1(180,170) ; v1(235,-60) 259.53,-60 C11.1@265,-65.47
VOLTAGE_WAVEFORM: pad.@500,100 R17.2 U4.7 U5.4 | length 907.1
  Top Layer w12: R17.2 -305.08,232.2 U4.7 -207.2,232.2 -135,160 -22.28,160 U5.4 -20.59,135.59 0,115 v1(35,115)
  Bottom Layer w12: v1(35,115) 55,135 195,135 230,100 pad.@500,100
VOLTAGEMEASUREEN: J2.11 Q10.5 R22.1 | length 1206.3
  Top Layer w8: v1(-360,-180) -360,-185 -330,-215 -191.87,-215 -136.87,-270 85,-270 126.38,-311.38 J2.11 ; v1(-350,390) Q10.5
  Signal Layer 2 w8: v1(-360,-180) -350,-170 v1(-350,390)
  Bottom Layer w8: R22.1 -357.28,382.72 v1(-350,390)
VOLTAGESENSEIN: R14.2 U4.5 | length 369.6
  Top Layer w12: v4(-475,100) -475,180 -371.61,283.39 U4.5 -286.36,303.13 R14.2
VOLTAGETRIGGER: J1.5 pad.@500,200 R12.2 U5.1 | length 765.1
  Top Layer w8: v1(-126.38,316.19) J1.5 ; R12.2 40,290 v1(45,285) ; U5.1 53.9,225 v1(205,225)
  Top Layer w12: U5.1 30.59,287.13
  Bottom Layer w8: v1(-126.38,316.19) -36.19,316.19 -5,285 v1(45,285) ; v1(205,225) 475,225 pad.@500,200
VREF: R13.2 R15.1 U4.3 | length 118.6
  Top Layer w12: U4.3@-95.59,260 U4.3 -90.59,255 v1(-50,255)
  Bottom Layer w12: R13.2 R15.1 -52.28,257.28 v1(-50,255)
VREF_BUF: J2.5 R14.1 U2.5 U4.1 U4.2 | length 1326.9
  Top Layer w8: J2.5 173.62,-406.38 185,-395 240,-395 260,-375 260,-124.53 235,-99.53 U2.5
  Top Layer w12: R14.1 -269.07,349.07 -260,340 -260,320 -247.28,307.28 -232.28,307.28 -157.2,232.2 U4.2 U4.1 -91.77,205 v1(-45,205) ; v1@206.1,-118.9 U2.5
  Bottom Layer w12: v1(-45,205) -45,160 20,95 20,25 46,-1 108.7,-1 109.7,0 185,0 205,-20 v1(205,-120)
pads on no net: D5.2 D5.5 J1. J2. U3.10 U6.2 U6.5

## Polygon pours and split planes (outlines as drawn)
GND on GND "Top Layer-No Net" (solid, pour order 4): -550,-420 -550,-360 -430,-360 -430,-275 -550,-275 -550,275 -430,275 -430,360 -550,360 -550,420 cw(c-460,420) -460,510 180,510 180,245 550,245 550,-245 325,-245 325,-510 -460,-510 cw(c-460,-420)

## Keep-outs
Keep-Out Layer:
  the board outline again, w10

## Silkscreen, mask and mechanical layers (free items; w line width, h text height)
Top Overlay:
  region: 331.09,-86.06 396.05,-86.06 396.05,-51.38 382.84,-51.38 382.84,-20 415.04,-65.14 417.24,-65.14 450,-20 450,-51.38 436.79,-51.38 436.79,-86.06 501.75,-86.06 501.75,-51.38 488.54,-51.38 488.54,0.92 501.75,0.92 501.75,35.6 450.28,35.6 417.24,-10.09 415.59,-10.09 382.56,35.6 331.09,35.6 331.09,0.92 343.75,0.92 343.75,-51.38 331.09,-51.38
  text "V" at -535,85 h30
  text "B" at -535,-15 h30
  text "W" at -535,-115 h30
  text "Triumvi" at 325,-130 h30
  text "Sensing" at 320,-175 h30
  text "V9, Kuo" at 325,-225 h30
  text "Apr.16" at -170,-470 h30
Bottom Overlay:
  text "Vcc" at 135,390 h30
  text "VH" at -450,375 h30
  text "CMP" at 455,185 h30
  text "V" at -535,85 h30
  text "Volt" at 455,80 h30
  text "B" at -535,-15 h30
  text "Curt" at 455,-20 h30
  text "W" at -535,-115 h30
  text "VCap" at 455,-120 h30
  text "GND" at 440,-220 h30
  text "PG" at -450,-490 h30
Mechanical 14:
  lines w10: -560,-285 -439,-285 -439,-350 -559,-350 -559,-420 ccw(c-459,-420) -459,-520 ; -560,285 -439,285 -439,350 -559,350 -559,420 cw(c-459,420) -459,520 ; 190,520 190,255 586,255 ; 336,-520 336,-255 586,-255
Mechanical 16:
  lines w10: -649,-520 651,-520 ; -649,520 651,520 ; -559,-610 -559,610 ; 561,-610 561,610